# EAGLE board display (EAGLE 6.5.0)
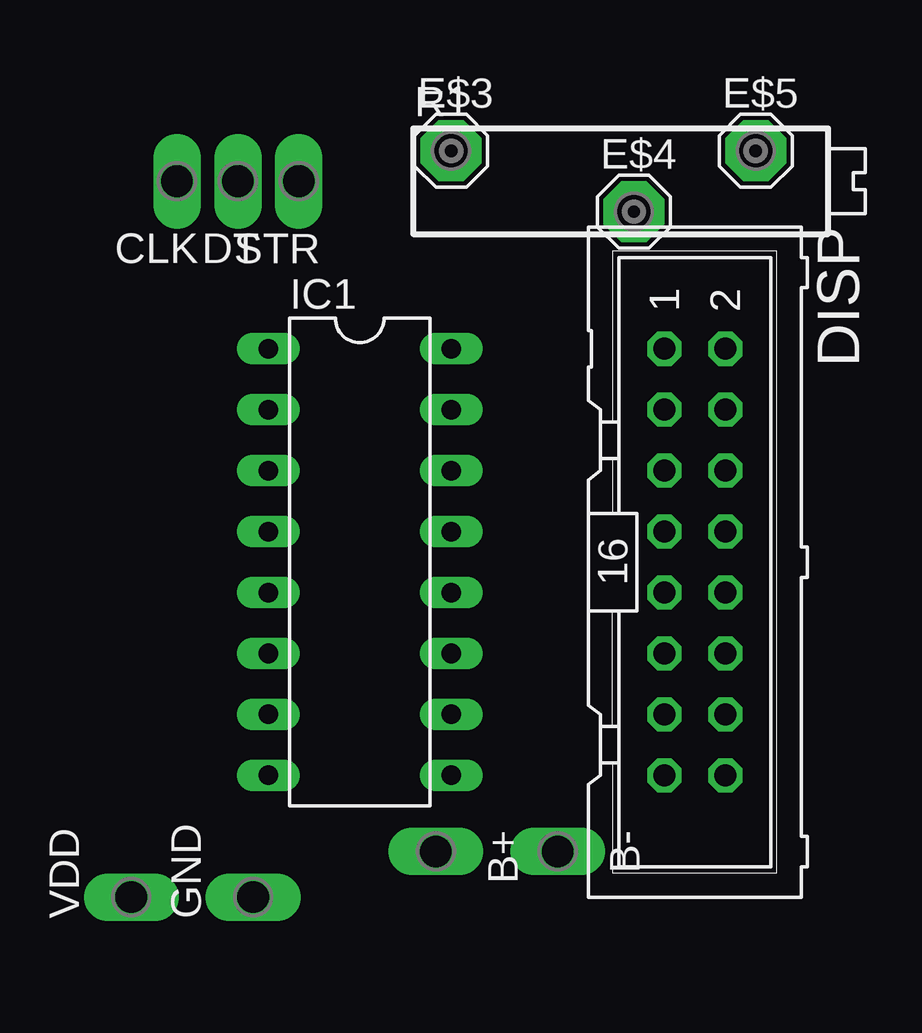
[diagram p0: board, top side]
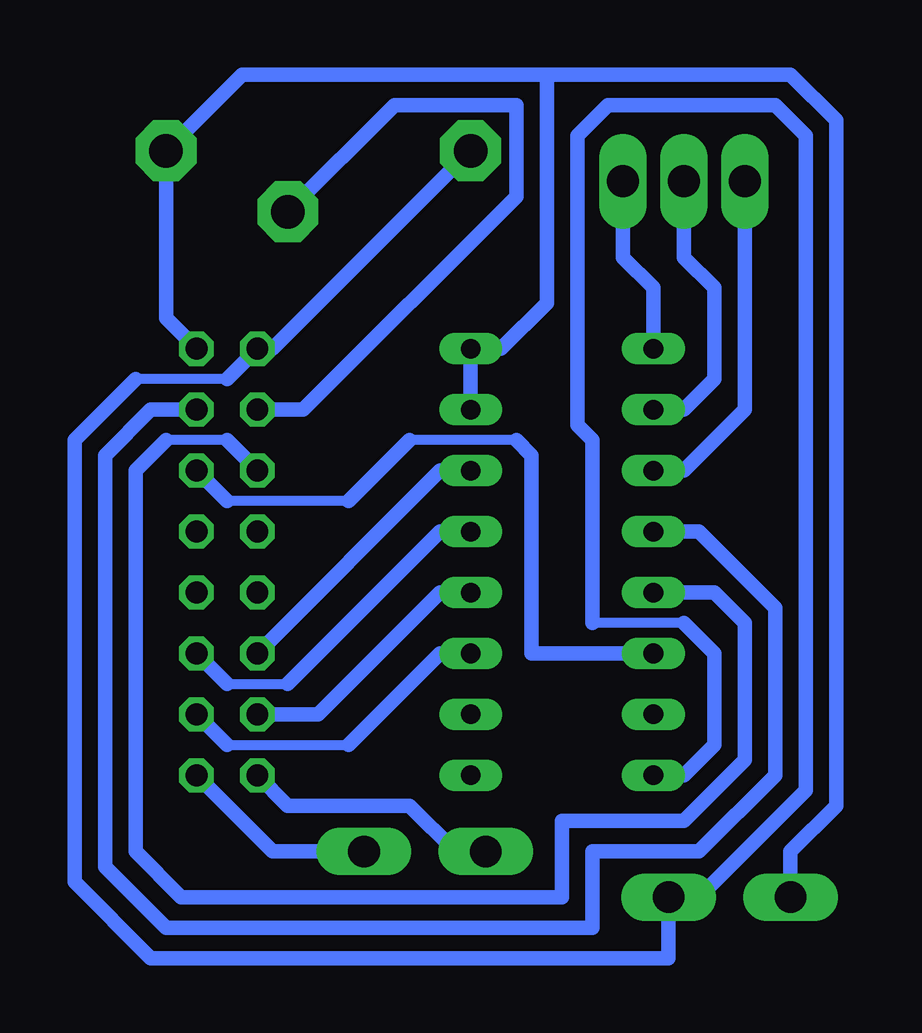
[diagram p1: board, bottom side, seen from below]

No outline drawn. Coordinates in mm, seen from the top.
Copper layers (1*16): Top 0.035mm / dielectric 1.5mm / Bottom 0.035mm
Design rules "default": minimum track width 10mil, minimum drill 24mil, track to track 8mil, track to pad 8mil, pad to pad 8mil, via to via 8mil, smd to smd 8mil, copper to edge 40mil, drill to drill 8mil, minimum pad ring 10mil, minimum via ring 8mil, stop-mask expansion 4mil, vias tented up to drill 0mil, thermal gap 10mil

## Footprints (pad centres in the part's own frame; a part is rotated, then mirrored left to right if it is on the bottom)
P1-13Y = drill 1.321 pad 1.905 long: TP 0,0
ML16 = drill 0.914 octagon: 1 -8.89,-1.27; 2 -8.89,1.27; 3 -6.35,-1.27; 4 -6.35,1.27; 5 -3.81,-1.27; 6 -3.81,1.27; 7 -1.27,-1.27; 8 -1.27,1.27; 9 1.27,-1.27; 10 1.27,1.27; 11 3.81,-1.27; 12 3.81,1.27; 13 6.35,-1.27; 14 6.35,1.27; 15 8.89,-1.27; 16 8.89,1.27
SE14 = drill 1.397 pad 2.54 octagon: MP 0,0
DIL16 = drill 0.813 long: 1 -8.89,-3.81; 2 -6.35,-3.81; 3 -3.81,-3.81; 4 -1.27,-3.81; 5 1.27,-3.81; 6 3.81,-3.81; 7 6.35,-3.81; 8 8.89,-3.81; 9 8.89,3.81; 10 6.35,3.81; 11 3.81,3.81; 12 1.27,3.81; 13 -1.27,3.81; 14 -3.81,3.81; 15 -6.35,3.81; 16 -8.89,3.81
RTRIM43P = drill 0.9: 1 -7.62,1.27; 2 0,-1.27; 3 5.08,1.27

## Placement (x,y rotation side)
B+  [P1-13Y]  15.24,5.08 270 top
B-  [P1-13Y]  20.32,5.08 270 top
CLK  [P1-13Y]  4.45,33.02 180 top
DISP  [ML16]  26.04,17.14 270 top
DT  [P1-13Y]  6.99,33.02 180 top
E$3  [SE14]  15.88,34.29 0 top
E$4  [SE14]  23.5,31.75 0 top
E$5  [SE14]  28.57,34.29 0 top
GND  [P1-13Y]  7.62,3.17 90 top
IC1  4094  [DIL16]  12.06,17.14 270 top
R1  50k  [RTRIM43P]  23.5,33.02 0 top
STR  [P1-13Y]  9.53,33.02 180 top
VDD  [P1-13Y]  2.54,3.17 90 top

## Library data of the parts
B+ B- CLK DT GND STR VDD = testpad
DISP = con-harting-ml
E$3-E$5 = solpad
IC1 = 40xx
R1 = rcl

## Nets
GND: DISP.1 GND.TP IC1.8 R1.1
S$2: B-.TP DISP.16
S$3: DISP.3 R1.2
S$4: IC1.1 STR.TP
S$5: DT.TP IC1.2
S$6: CLK.TP IC1.3
S$8: DISP.4 IC1.4
S$9: DISP.5 IC1.5
S$10: DISP.6 IC1.6
S$11: DISP.11 IC1.14
S$12: DISP.12 IC1.13
S$13: DISP.13 IC1.12
S$14: DISP.14 IC1.11
S$15: B+.TP DISP.15
VDD: DISP.2 IC1.15 IC1.16 R1.3 VDD.TP

## Tracks (layer width: path | path; a pad name or v marks a point on that pad's centre or on a via)
GND
  Bottom 0.406: 6.99,14.61 10.79,14.61 | 26.04,24.77 29.84,24.77
  Bottom 0.61: 26.04,24.77 DISP.1 24.13,26.04 R1.1 | 6.99,14.61 5.71,13.34 5.71,9.53 6.99,8.26 IC1.8 | 10.79,14.61 10.79,22.23 11.43,22.86 11.43,34.92 10.16,36.2 3.17,36.2 1.91,34.92 1.91,7.62 6.35,3.17 GND.TP 7.62,0.64 29.21,0.64 32.38,3.81 32.38,22.23 29.84,24.77
S$2
  Bottom 0.61: DISP.16 24.13,5.08 B-.TP
S$3
  Bottom 0.61: R1.2 19.05,36.2 13.97,36.2 13.97,32.38 22.86,23.5 DISP.3
S$4
  Bottom 0.61: STR.TP 9.53,29.84 8.26,28.57 IC1.1
S$5
  Bottom 0.61: DT.TP 6.99,29.84 5.71,28.57 5.71,24.77 6.99,23.5 IC1.2
S$6
  Bottom 0.61: CLK.TP 4.45,23.5 6.99,20.95 IC1.3
S$8
  Bottom 0.61: IC1.4 6.35,18.41 3.17,15.24 3.17,8.26 6.35,5.08 10.79,5.08 10.79,1.91 28.57,1.91 31.11,4.45 31.11,21.59 29.21,23.5 DISP.4
S$9
  Bottom 0.406: 26.04,22.23 28.57,22.23
  Bottom 0.61: 26.04,22.23 DISP.5 | IC1.5 5.71,15.88 4.45,14.61 4.45,8.89 6.99,6.35 12.06,6.35 12.06,3.17 27.94,3.17 29.84,5.08 29.84,20.95 28.57,22.23
S$10
  Bottom 0.406: 13.97,22.23 18.41,22.23 | 20.95,19.68 26.04,19.68
  Bottom 0.61: 13.97,22.23 13.34,21.59 13.34,13.34 IC1.6 | 18.41,22.23 20.95,19.68 | 26.04,19.68 DISP.6
S$11
  Bottom 0.61: DISP.11 17.14,20.95 IC1.14
S$12
  Bottom 0.406: 26.04,12.06 23.5,12.06
  Bottom 0.61: DISP.12 26.04,12.06 | 23.5,12.06 17.14,18.41 IC1.13
S$13
  Bottom 0.61: DISP.13 22.23,10.79 17.14,15.88 IC1.12
S$14
  Bottom 0.406: 26.04,9.53 20.95,9.53
  Bottom 0.61: DISP.14 26.04,9.53 | 20.95,9.53 17.14,13.34 IC1.11
S$15
  Bottom 0.61: DISP.15 23.5,6.99 18.41,6.99 16.51,5.08 B+.TP
VDD
  Bottom 0.61: IC1.15 IC1.16 14.61,26.04 12.7,27.94 12.7,37.47 | DISP.2 28.57,27.3 R1.3 25.4,37.47 12.7,37.47 | 12.7,37.47 2.54,37.47 0.64,35.56 0.64,6.99 2.54,5.08 VDD.TP